# Altium PCB Optocoupler.PcbDoc
Units mil, origin at the board's own origin, x right, y up, seen from the top; angles counter-clockwise.
Board outline 1685 x 1650 mil, 2 copper layers (Top Layer, Bottom Layer); 13 components, 15 nets, 50 pads, 0 vias.
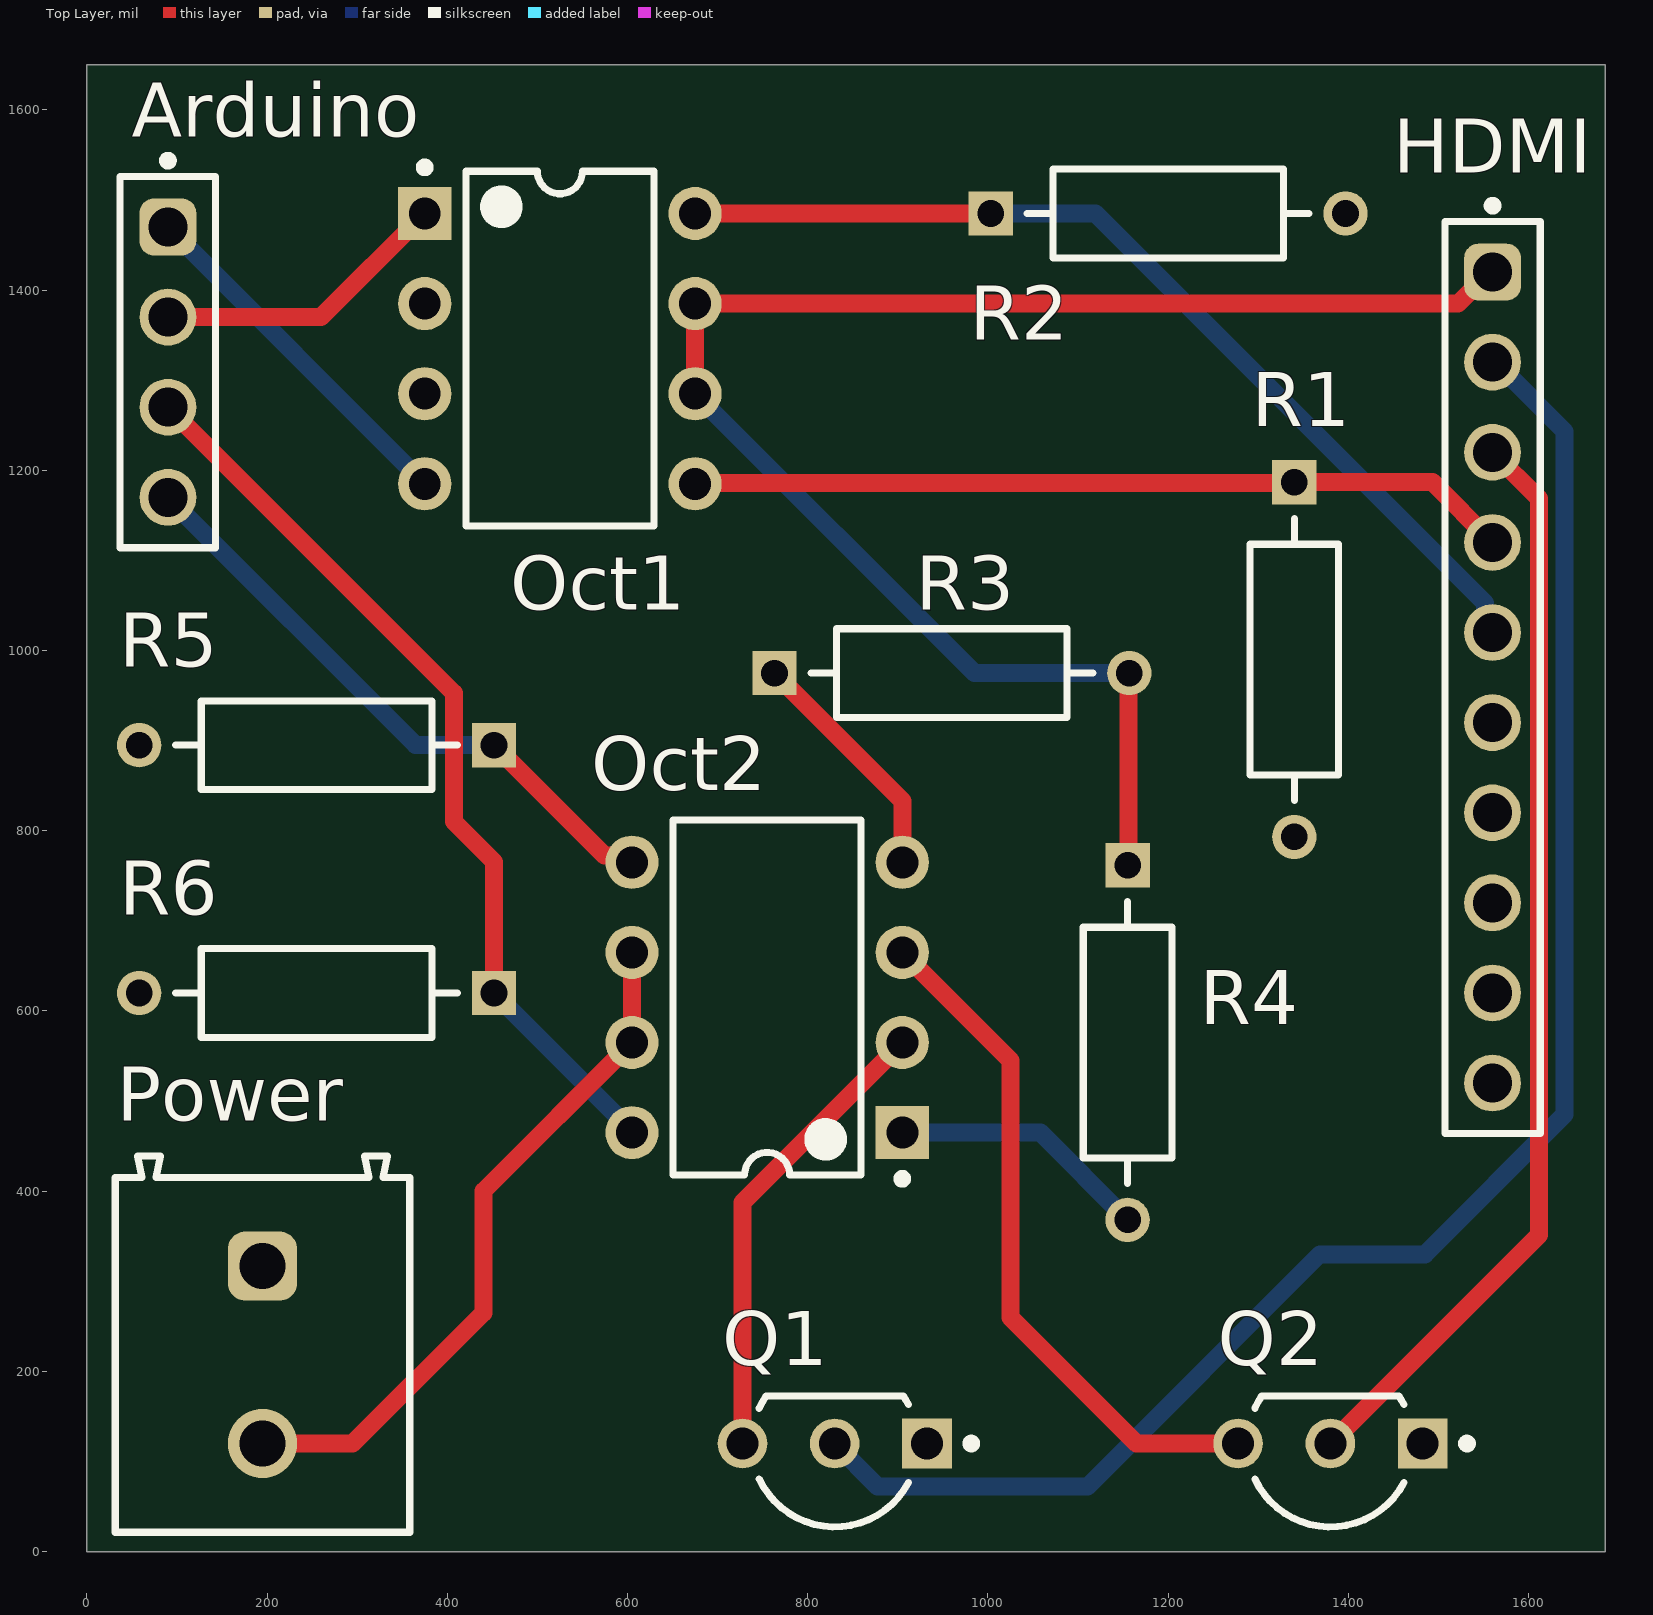
[diagram p0: Top Layer view]
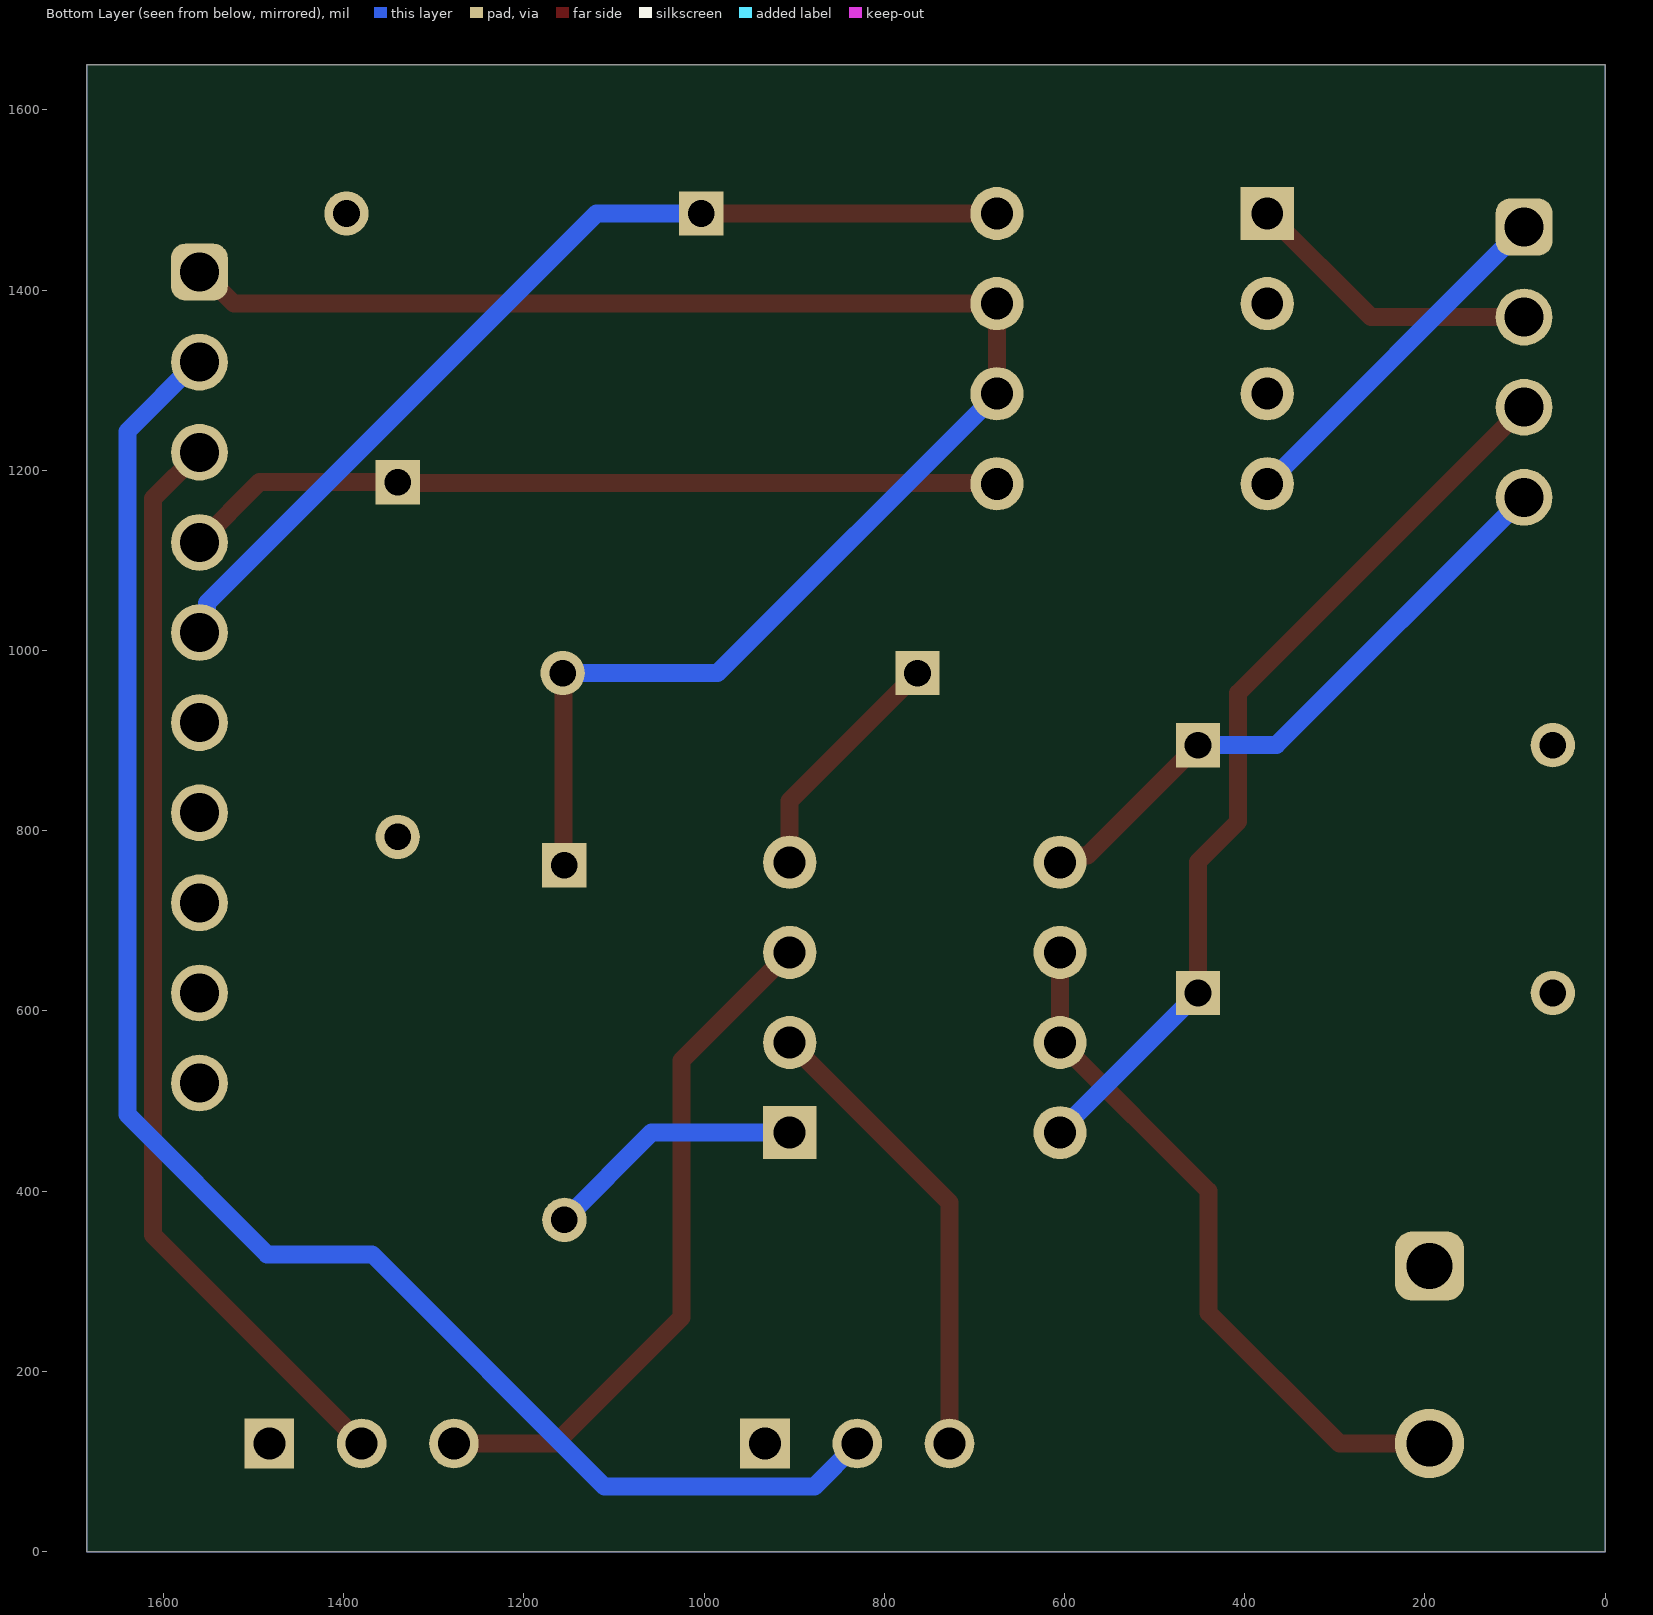
[diagram p1: Bottom Layer view, seen from below]
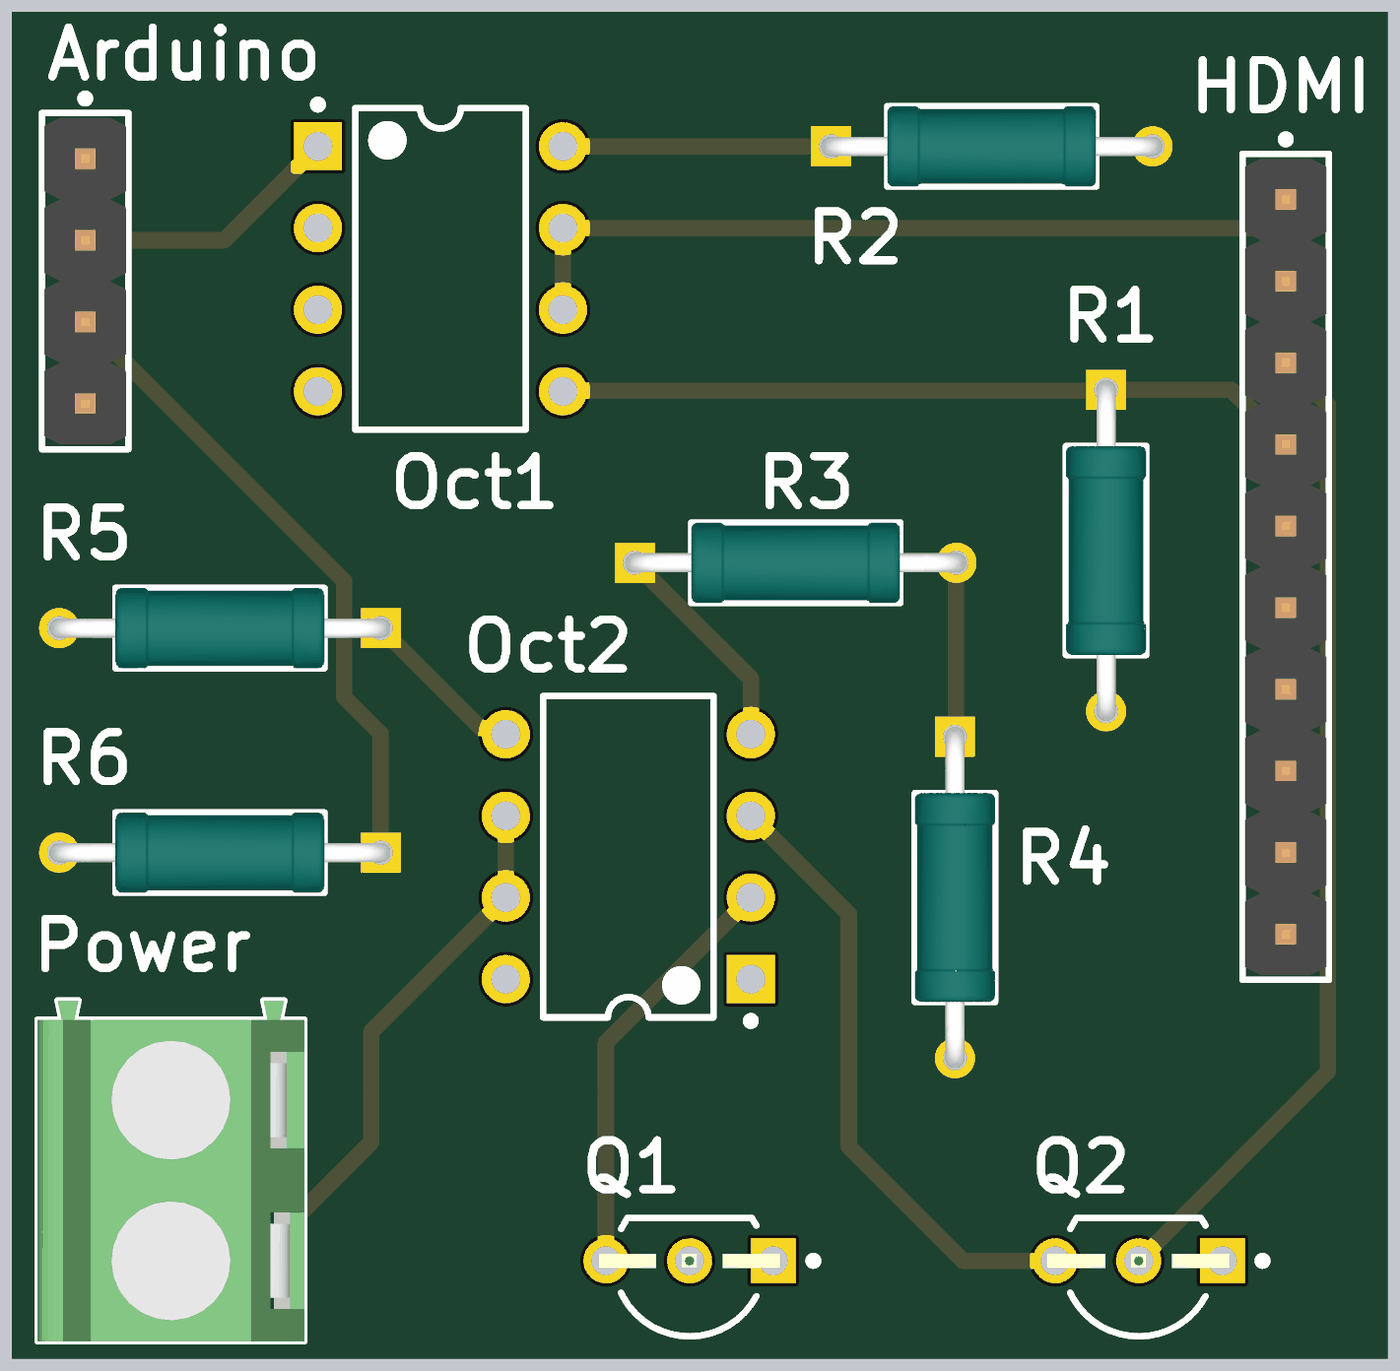
[diagram p2: 3D render of the assembled board from above, using the file's embedded part models]

## Layer stack, top to bottom
Top Solder: solder mask 0.4, Solder Resist, Dk 3.5
Top Layer: signal copper 1.4
Dielectric 1: dielectric 12.6, FR-4, Dk 4.8
Bottom Layer: signal copper 1.4
Bottom Solder: solder mask 0.4, Solder Resist, Dk 3.5

## Board outline
0,0 1685,0 1685,1650 0,1650

## Design rules (kind name [scope] priority, off if disabled: settings)
Clearance [All] p1: gap=10 ignorepadtopadclearanceinfootprint=FALSE
PolygonConnect [All] p1: connectstyle=Relief reliefconductorwidth=10 reliefentries=4 polygonreliefangle="90 Angle" airgapwidth=10
RoutingVias [All] p1: holewidth=28 width=50 viastyle="Through Hole" minholewidth=28 minwidth=50 maxholewidth=28 maxwidth=50
SolderMaskExpansion [All] p1: expansion=4 istentingtop=FALSE
Width [All] p1: maxlimit=40 minlimit=10 preferedwidth=20 minimp=50.000000 maximp=50.000000 favimp=50.000000
30 further rules are at their usual default settings.

## Components (designator, comment, footprint, x,y, rotation, side; value= is the part's Value field where it differs from the comment)
Arduino "61300411121" 61300411121 90,1320 r270 top
HDMI "61301011121" 61301011121 1560,970 r270 top
Oct1 "" VISH-DIP8 525,1335 r0 top
Oct2 "" VISH-DIP8 755,615 r180 top
Power "691213710002" 691213710002 195,218.42 r270 top
Q1 "" ONSC-TO-92-3-29-11_AM_BL 830,120 r180 top
Q2 "" ONSC-TO-92-3-29-11_AM_BL 1380,120 r180 top
R1 "" FP-MRS25-MFG 1340,990 r270 top
R2 "" FP-MRS25-MFG 1200,1485 r0 top
R3 "" FP-MRS25-MFG 960,975 r0 top
R4 "" FP-MRS25-MFG 1155,565 r270 top
R5 "" FP-MRS25-MFG 255,895 r180 top
R6 "" FP-MRS25-MFG 255,620 r180 top

## Footprints (in the part's own frame and the unit in brackets; to place one, negate y for a bottom-side part, rotate by r counter-clockwise, add the part's x,y. Pads: shape width x height; smd on the part's side, far side on the other; paste and mask are expansions set on the pad)
61300411121 [mm] "Pin Header, pitch 2.54 mm, THT, Vertical, single row, 4p"
  rrect50% 1.6x1.6 hole 1.1: 1(-3.81,0)
  round 1.6 hole 1.1: 2(-1.27,0) 3(1.27,0) 4(3.81,0)
  silkscreen extent -5.8,-1.35 5.23,1.35, body extent -5.08,-1.27 5.08,1.27, height 8.57
61301011121 [mm] "Pin Header, pitch 2.54 mm, THT, Vertical, single row, 10p"
  rrect50% 1.6x1.6 hole 1.1: 1(-11.43,0)
  round 1.6 hole 1.1: 2(-8.89,0) 3(-6.35,0) 4(-3.81,0) 5(-1.27,0) 6(1.27,0) 7(3.81,0) 8(6.35,0) 9(8.89,0) 10(11.43,0)
  silkscreen extent -13.42,-1.35 12.85,1.35, body extent -12.7,-1.27 12.7,1.27, height 8.57
691213710002 [mm] "5,00mm - modular - green - Horizontal entry with rising cage clamp -  10,0mm height - 02p"
  rrect50% 1.95x1.95 hole 1.3: 1(-2.5,0)
  round 1.95 hole 1.3: 2(2.5,0)
  silkscreen extent -5.6,-4.15 5,4.15, body extent -5.6,-4.15 5,4.15, height 10.05
FP-MRS25-MFG [mm]
  rect 1.25x1.25 hole 0.75 paste-2539.97 mask+0: 1(-5,0)
  round 1.25 hole 0.75 paste-2539.97 mask+0: 2(5,0)
  silkscreen extent -3.98,-1.25 3.98,1.25, body extent -5.72,-1.35 5.72,1.35, height 0.25
ONSC-TO-92-3-29-11_AM_BL [mm] "TO, 3-Leads, Body Dia 4.7mm, Pitch 2.6mm"
  rect 1.4x1.4 hole 0.9: 1(-2.6,0)
  round 1.4 hole 0.9: 2(0,0) 3(2.6,0)
  silkscreen extent -3.98,-1.34 2.13,2.35, body extent -2.84,-1.34 2.84,2.35, height 5.33
VISH-DIP8 [mm] "DIP, 8-Leads, Body 9.9x6.8mm, Pitch 2.54mm"
  rect 1.5x1.5 hole 0.9: 1(-3.81,3.81)
  round 1.5 hole 0.9: 2(-3.81,1.27) 3(-3.81,-1.27) 4(-3.81,-3.81) 5(3.81,-3.81) 6(3.81,-1.27) 7(3.81,1.27) 8(3.81,3.81)
  silkscreen extent -3.93,-5 2.65,5.23, body extent -3.95,-4.95 3.95,4.95, height 4.58

## Part data
Arduino: library part CMP-1502-01064-3, Color=Black, Contact Resistance=20mΩ, Current Rating=3A, Max Operating Temperature=105°C, Min Operating Temperature=-40°C, Operating Supply Voltage=250V, Connector Type="Male Pin", Contact Material=Copper, Contact Mating Length=5.9944mm, Contact Plating=Gold, Gender=Male, Height=8.89mm, Lead Free="Lead Free", Lead Pitch=2.54mm, Mount="Through Hole", NexarPartId=32855522, Number of Contacts=4, Number of Pins=4, Number of Positions=4, Number of Rows=1, Orientation=Vertical, Packaging=Bulk, Pitch=2.54mm, REACH SVHC=Unknown, RoHS=Compliant, Termination=Solder, Voltage Rating=250V
HDMI: library part CMP-1502-01082-5, Color=Black, Contact Resistance=20mΩ, Current Rating=3A, Flammability Rating="UL94 V-0", Insulation Resistance=1GΩ, Max Operating Temperature=105°C, Min Operating Temperature=-40°C, Operating Supply Voltage=250V, Connector Type="Male Pin", Contact Gender=Male, Contact Material=Copper, Contact Mating Length=5.9944mm, Contact Plating=Gold, Gender=Male, Height=8.74mm, Housing Material=PBT, Lead Pitch=2.54mm, Length=2.54mm, Mount="Through Hole", NexarPartId=18818159, Number of Contacts=10, Number of Pins=10, Number of Positions=10, Number of Rows=1, Orientation=Vertical, Packaging=Bulk, Pitch=2.54mm, REACH SVHC=Unknown, RoHS=Compliant, Termination=Solder, Voltage Rating=250V, Width=25.4mm
Oct1 Oct2: library part CMP-1666-00026-1, "Optocoupler, Phototransistor Output, Dual Channel, 1.3 V, -55 to 100 degC, 8-Pin DIP, RoHS, Tube", Case\Package=Axial, Max Operating Temperature="155 degC", Min Operating Temperature="-55 degC", Package Quantity=200, Power Rating="250 mW", Resistance="22.1 Ohm", Tolerance=1%, Voltage Rating="250 V", ComponentLink1Description="Manufacturer URL", ComponentLink1URL=http://www.vishay.com/, ComponentLink2Description=Datasheet, ComponentLink2URL=http://www.vishay.com/docs/83640/ild74.pdf, ComponentLink3Description="Package Specification", ComponentLink3URL=http://www.vishay.com/docs/83241/83241.pdf, DatasheetVersion="Rev. 1.7, 05/2011", Length="0.248 inch", Mount="Through Hole", PackageDescription="8-Pin Double In-line Package, Body 9.77 x 6.645 mm, Pitch 2.54 mm", PackageReference=DIP8, PackageVersion="Rev. 1.1, 12/2003", Packaging=Bulk, RoHSCompliant=true
Power: library part CMP-1502-02526-2, Color=Green, Current=10A, Max Operating Temperature=105°C, Min Operating Temperature=-40°C, Voltage=300V, Contact Material=Brass, Contact Plating=Tin, Current Rating=10A, Height=10mm, Housing Material=Nylon, Lead Pitch=5mm, Length=8.3mm, Mount="Through Hole", NexarPartId=8917718, Number of Contacts=2, Number of Levels=1, Number of Pins=2, Number of Positions Per Level=2, Packaging=Box, Pitch=5.0038mm, Plating="Brass, Steel", REACH SVHC=Unknown, RoHS=Compliant, Stripping Length=-7mm, Termination=Screw, Voltage Rating=300V, Width=10.6mm, Wire Gauge (Max)=26AWG, Wire Gauge (Min)=16AWG, Wire/Cable Gauge=26AWG
Q1 Q2: library part CMP-1058-00942-1, "Small Signal MOSFET, 200 mA, 60 V, N-Channel, 3-Pin TO-92, Pb-Free, Tape and Reel", Manufacturer="On Semiconductor", Package Type=TO-92, PartNumber=2N7000RLRAG, Channel Polarity="N Channel", Ciss Typ (pF)=60, ComponentLink1Description="Manufacturer URL", ComponentLink1URL=http://www.onsemi.com/, ComponentLink2Description=Datasheet, ComponentLink2URL=http://www.onsemi.com/pub_link/Collateral/2N7000-D.PDF, ComponentLink3Description="Package Specification", ComponentLink3URL=http://www.onsemi.com/pub_link/Collateral/MAC97-D.PDF, Configuration=Single, Coss Typ (pF)=25, Crss Typ (pF)=5, DatasheetVersion="Rev. 8", ID Max (A)=0.2, Mounting Technology="Through Hole", PackageDescription="3-Pin Transistor Outline, Body 4.825 x 3.685 mm, Pitch 1.27 mm", PackageReference=TO-92-3-29-11_AM_BL, PackageVersion="Rev. AM", Packing="Tape and Reel", PD Max (W)=0.35, RoHS=Pb-Free, V(BR)DSS Min (V)=60, VGS Max (V)=20, VGS(th) Max (V)=3
R1 R2 R3 R4 R5 R6: library part CMP-00030-42757237-1, "MRS25000C1000FRP00 Resistor, 100 Ohm, ± 1%, 600 mW, Axial Leaded, Metal Film (Thin Film), Professional", Case/Package=Axial, Max Operating Temperature=155°C, Max Power Dissipation=600mW, Min Operating Temperature=-55°C, Resistance=100Ω, Temperature Coefficient=50ppm/°C, Tolerance=1%, Voltage Rating=350V, Composition="Metal Film, Thin Film", Contact Plating=Tin, Diameter=2.5mm, Lead Diameter=600µm, Lead Free="Lead Free", Length=6.5mm, Military Standard=Not, Mount="Through Hole", NexarPartId=42757237, Number of Pins=2, Number of Terminations=2, Packaging="Tape & Reel (TR)", Power Rating=600mW, Radiation Hardening=No, REACH SVHC=Unknown, RoHS=Compliant, Schedule B="8533210090, 8533210090", Termination=Axial, Voltage Rating (DC)=350V, Width=2.5mm

## Nets (pads, with @x,y where several pads share a name; then routed paths per layer and width w, separated by ;. In a path a pad name is that pad's centre, name@x,y a point inside that pad or via, vN(x,y) a via of type N, cw(c..) or ccw(c..) an arc to the next point about the centre after c; other vN are vias at no path point)
5V_In: Oct2.6 Oct2.7 Power.2 | length 773.4
  Top Layer w20: Power.2 295.01,120.01 440,265 440,400 Oct2.7 Oct2.6
GND: HDMI.10 Oct1.2 Oct1.3 Power.1 Q1.1 Q2.1 R1.2 R2.2 R5.2 R6.2
NetArduino_1: Arduino.1 Oct1.4 | length 403.1
  Bottom Layer w20: Arduino.1 Oct1.4
NetArduino_2: Arduino.2 Oct1.1 | length 332.6
  Top Layer w20: Arduino.2 260,1370 Oct1.1
NetArduino_3: Arduino.3 Oct2.8 R6.1 | length 1021.9
  Top Layer w20: Arduino.3 407.24,952.76 407.24,810.17 451.85,765.56 R6.1 ; Oct2.8@602.5,467.5 Oct2.8
  Bottom Layer w20: R6.1 605,466.85 Oct2.8
NetArduino_4: Arduino.4 Oct2.5 R5.1 | length 686.3
  Top Layer w20: R5.1 574.38,772.47 597.53,772.47 Oct2.5 Oct2.5@602.5,762.5
  Bottom Layer w20: Arduino.4 365,895 R5.1
NetHDMI_1: HDMI.1 Oct1.6 Oct1.7 R3.2 R4.1 | length 1826.8
  Top Layer w20: Oct1.6 Oct1.7 1521.89,1385 1556.89,1420 HDMI.1 ; R4.1 1155.93,762.78 1155.93,974.07 R3.2
  Bottom Layer w20: Oct1.6 985,975 R3.2 ; HDMI.1@1556.89,1420 HDMI.1
NetHDMI_2: HDMI.2 Q1.2 | length 1870.6
  Bottom Layer w20: Q1.2 877.56,72.44 1110.73,72.44 1368.28,330 1485,330 1640,485 1640,1243.28 1563.28,1320 HDMI.2
NetHDMI_3: HDMI.3 Q2.2 | length 1217.2
  Top Layer w20: Q2.2 1611.5,351.5 1611.5,1168.5 HDMI.3
NetHDMI_4: HDMI.4 Oct1.5 R1.1 | length 913.5
  Top Layer w20: Oct1.5 675.93,1185.93 1339.07,1185.93 R1.1 1493.15,1186.85 HDMI.4
NetHDMI_5: HDMI.5 Oct1.8 R2.1 | length 1091.9
  Top Layer w20: Oct1.8 R2.1
  Bottom Layer w20: R2.1 1119.35,1485 1551.77,1052.57 1551.77,1028.23 HDMI.5
NetOct2_1: Oct2.1 R4.2 | length 290.1
  Bottom Layer w20: Oct2.1 1058.15,465 R4.2
NetOct2_2: Oct2.2 Q1.3 | length 518.5
  Top Layer w20: Q1.3 727.64,387.64 Oct2.2
NetOct2_3: Oct2.3 Q2.3 | length 765.3
  Top Layer w20: Oct2.3 1025,545 1025,260 1165,120 Q2.3
NetOct2_4: Oct2.4 R3.1 | length 272.5
  Top Layer w20: R3.1 905,833.15 Oct2.4 Oct2.4@907.68,767.68
pads on no net: HDMI.6 HDMI.7 HDMI.8 HDMI.9

## Polygon pours and split planes (outlines as drawn)
GND on Bottom Layer "NONET_L02_P000" (solid, shelved, pour order 0): 0,0 0,1650 1685,1650 1685,0